# Altium PCB LED_FADER.PcbDoc
Units mm, origin at the board's own origin, x right, y up, seen from the top; angles counter-clockwise.
Board outline 30 x 24 mm, 2 copper layers (F.Cu, B.Cu); 15 components, 8 nets, 35 pads, 17 vias.
Unrouted connection lines stored in the file: 6.
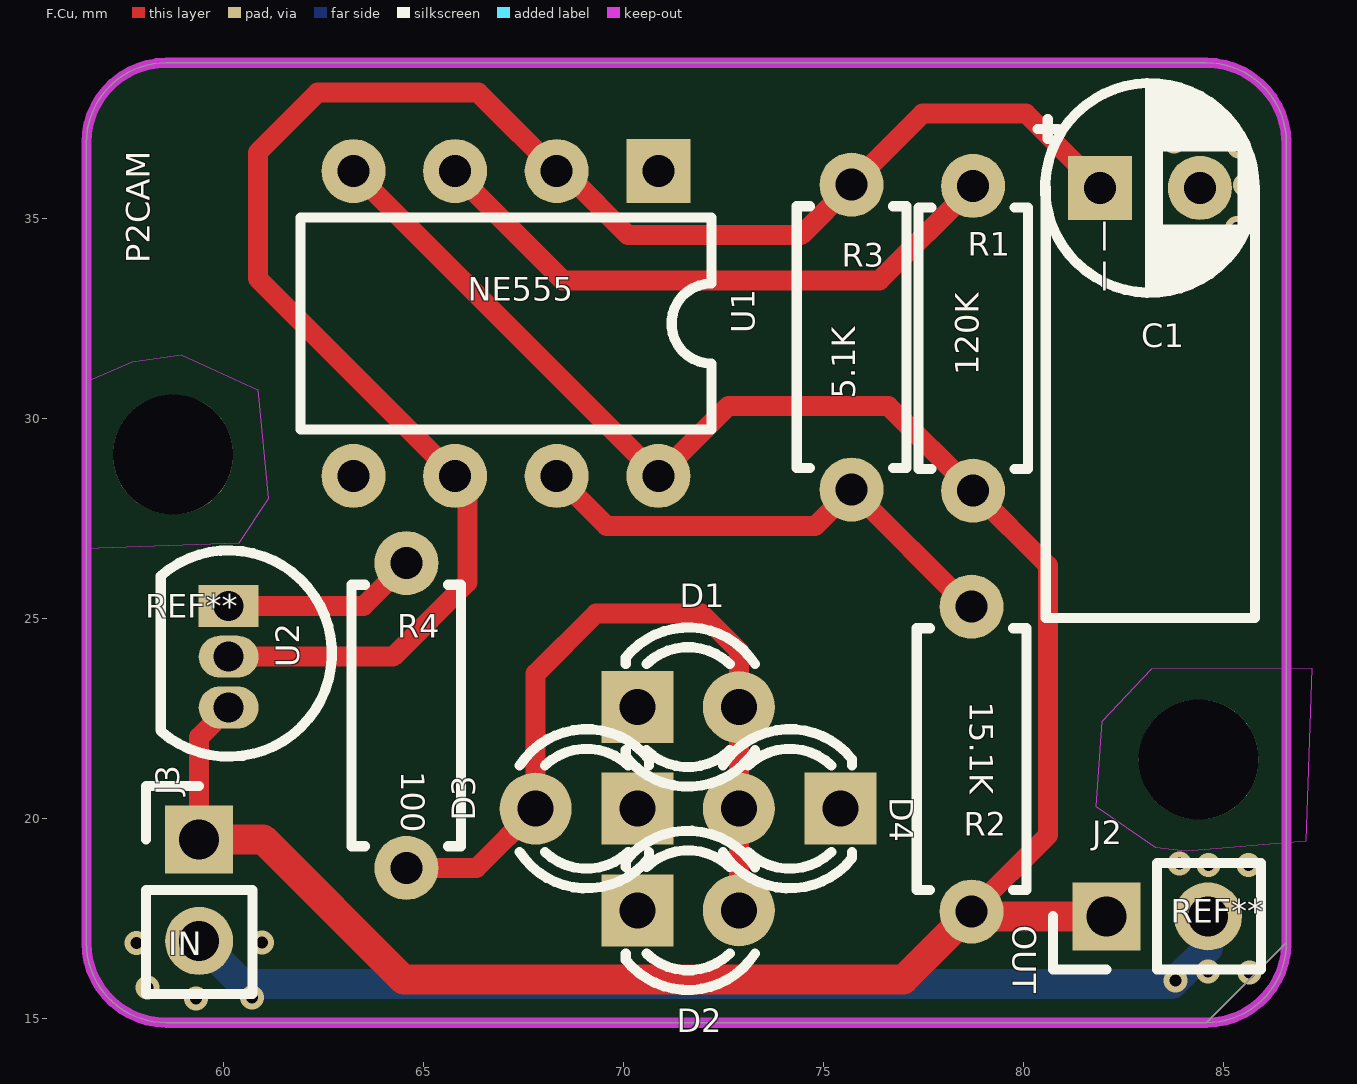
[diagram p0: F.Cu view]
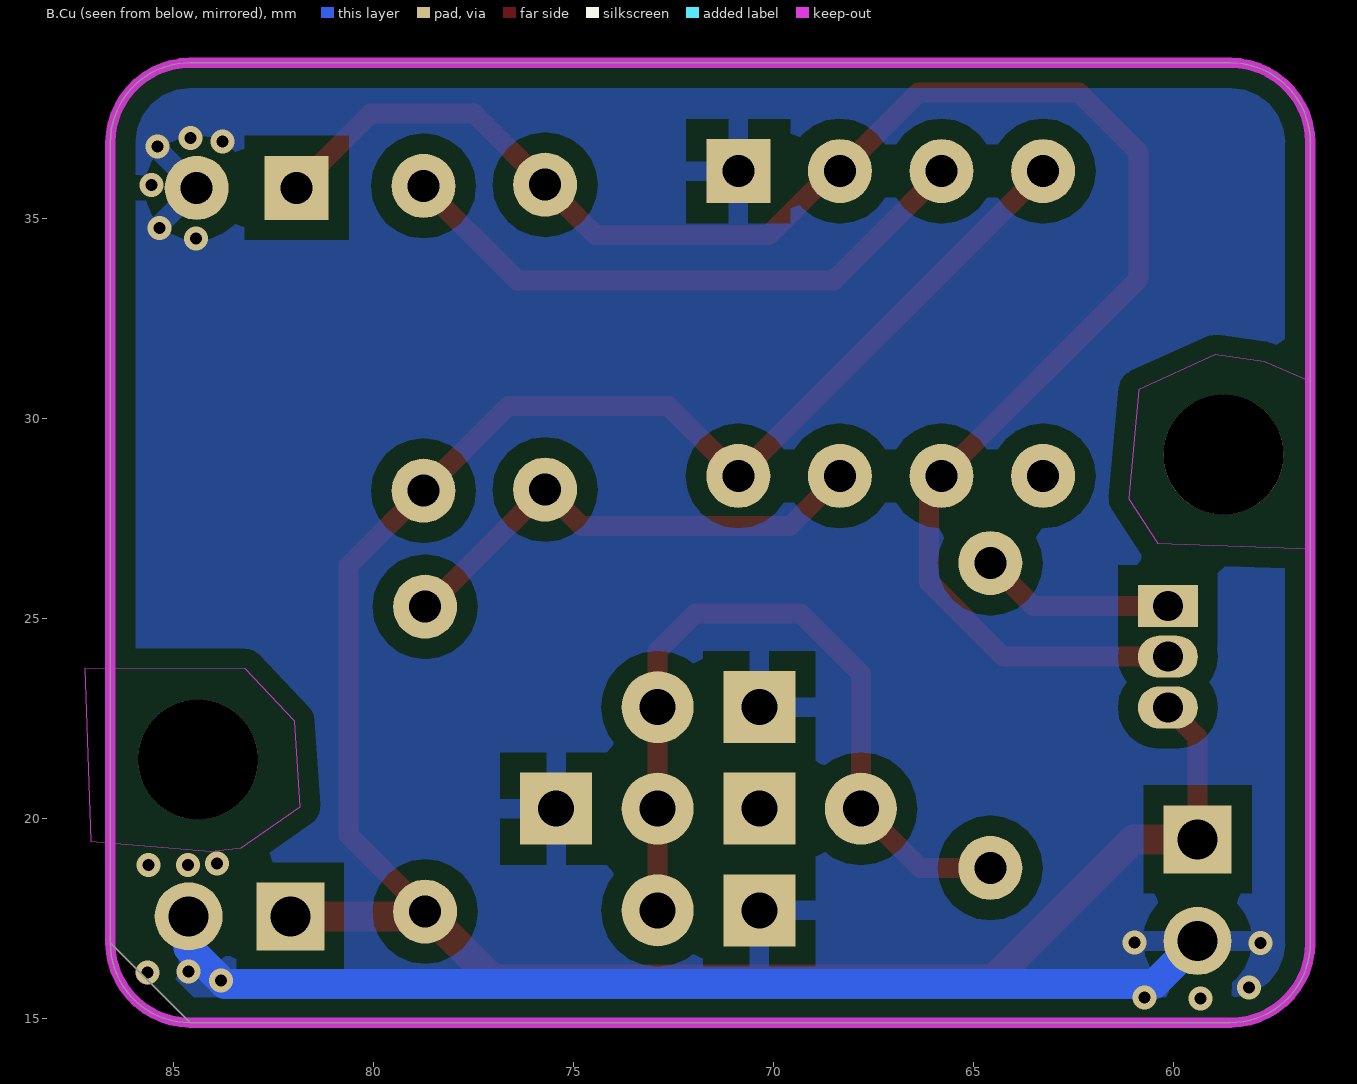
[diagram p1: B.Cu view, seen from below]

## Layer stack, top to bottom
F.Mask: solder mask 0.0102, Solder Resist, Dk 3.5
F.Cu: signal copper 0.0356
Dielectric 1: dielectric 0.32, FR-4, Dk 4.8
B.Cu: signal copper 0.0356
B.Mask: solder mask 0.0102, Solder Resist, Dk 3.5

## Board outline
86.58,16.9 cw(c84.58,16.9) 84.58,14.9 58.58,14.9 cw(c58.58,16.9) 56.58,16.9 56.58,36.9 cw(c58.58,36.9) 84.58,38.9 cw(c84.58,36.9) 86.58,36.9 86.58,16.9 cw(c84.58,16.9) 86.58,16.9

## Design rules (kind name [scope] priority, off if disabled: settings)
Clearance "Clearence 0.5_Polygon" [InNamedPolygon('B.Cu-GND')] p1: gap=0.5 ignorepadtopadclearanceinfootprint=FALSE
MinimumSolderMaskSliver [All] p1: minsoldermaskwidth=0
PolygonConnect Polygon_B.Cu-GND_ConnectDirect [IsNamedPolygon('B.Cu-GND') vs IsVia] p1: connectstyle=Direct reliefconductorwidth=0.254 reliefentries=4 polygonreliefangle="90 Angle" airgapwidth=0.254
PolygonConnect Polygon_B.Cu-GND_ConnectRelief45 [IsNamedPolygon('B.Cu-GND') vs (IsThruPin or IsSMTPin) and (PadShape_AllLayers = 'Round')] p2: connectstyle=Relief reliefconductorwidth=0.5 reliefentries=4 polygonreliefangle="45 Angle" airgapwidth=0.5
PolygonConnect Polygon_B.Cu-GND_ConnectRelief90 [IsNamedPolygon('B.Cu-GND') vs (IsThruPin or IsSMTPin) and (PadShape_AllLayers <> 'Round')] p3: connectstyle=Relief reliefconductorwidth=0.5 reliefentries=4 polygonreliefangle="90 Angle" airgapwidth=0.5
RoutingVias [All] p1: holewidth=0.711 width=1.27 viastyle="Through Hole" minholewidth=0.711 minwidth=1.27 maxholewidth=0.711 maxwidth=1.27
SilkToSilkClearance [All] p1: silktosilkclearance=0
SilkToSolderMaskClearance [IsPad] p1: minsilkscreentomaskgap=0 clearancetoexposedcopper=TRUE
SolderMaskExpansion [All] p1: expansion=0.102 istentingtop=FALSE
Width [All] p1: maxlimit=10 minlimit=0.254 preferedwidth=0.254 minimp=50.000000 maximp=50.000000 favimp=50.000000
27 further rules are at their usual default settings.

## Components (designator, comment, footprint, x,y, rotation, side; value= is the part's Value field where it differs from the comment)
C1 "Comment" CP_Radial_D5.0mm_P2.50mm 81.92,35.77 r0 top value=100u
D1 "Comment" LED_D3.0mm 70.355,22.79 r0 top value=LED_Filled
D2 "Comment" LED_D3.0mm 70.355,17.71 r0 top value=LED_Filled
D3 "Comment" LED_D3.0mm 70.355,20.25 r180 top value=LED_Filled
D4 "Comment" LED_D3.0mm 75.435,20.25 r180 top value=LED_Filled
J2 "Comment" PinHeader_1x02_P2.54mm_Vertical 82.08,17.56 r90 top value=Conn_01x02_MountingPin
J3 "Comment" PinHeader_1x02_P2.54mm_Vertical 59.4,19.485 r0 top value=Conn_01x02_MountingPin
R1 "Comment" R_Axial_DIN0207_L6.3mm_D2.5mm_P7.62mm_Horizontal 78.75,28.2 r90 top value=120K
R2 "Comment" R_Axial_DIN0207_L6.3mm_D2.5mm_P7.62mm_Horizontal 78.71,17.68 r90 top value=15.1K
R3 "Comment" R_Axial_DIN0207_L6.3mm_D2.5mm_P7.62mm_Horizontal 75.71,28.23 r90 top value=5.1K
R4 "Comment" R_Axial_DIN0207_L6.3mm_D2.5mm_P7.62mm_Horizontal 64.58,26.39 r270 top value=100
REF** "Comment" MountingHole_3mm 58.75,29.1 r180 top value=MountingHole_3mm
REF** "Comment" MountingHole_3mm 84.39,21.48 r180 top value=MountingHole_3mm
U1 "Comment" DIP-8_W7.62mm 70.88,36.19 r270 top value=NE555P
U2 "Comment" TO-92L_Inline 60.14,25.32 r270 top value=L78L06_TO92

## Footprints (in the part's own frame and the unit in brackets; to place one, negate y for a bottom-side part, rotate by r counter-clockwise, add the part's x,y. Pads: shape width x height; smd on the part's side, far side on the other; paste and mask are expansions set on the pad)
CP_Radial_D5.0mm_P2.50mm [mm]
  rect 1.6x1.6 hole 0.8 paste-2539.97 mask+0: 1(0,0)
  round 1.6 hole 0.8 paste-2539.97 mask+0: 2(2.5,0)
  silkscreen extent -1.55,-2.62 3.87,2.62
DIP-8_W7.62mm [mm]
  rect 1.6x1.6 hole 0.8 paste-2539.97 mask+0: 1(0,0)
  rrect100% 1.6x1.6 hole 0.8 paste-2539.97 mask+0: 2(0,-2.54) 3(0,-5.08) 4(0,-7.62) 5(7.62,-7.62) 6(7.62,-5.08) 7(7.62,-2.54) 8(7.62,0)
  silkscreen extent 1.16,-8.95 6.46,1.33
LED_D3.0mm [mm]
  rect 1.8x1.8 hole 0.9 paste-2539.97 mask+0: 1(0,0)
  round 1.8 hole 0.9 paste-2539.97 mask+0: 2(2.54,0)
  silkscreen extent -0.29,-1.99 2.94,1.99
MountingHole_3mm [mm]
  round 3 hole 3 paste-2539.97 mask+0: Un1(0,0)
PinHeader_1x02_P2.54mm_Vertical [mm]
  rect 1.7x1.7 hole 1 paste-2539.97 mask+0: 1(0,0)
  rrect100% 1.7x1.7 hole 1 paste-2539.97 mask+0: 2(0,-2.54)
  silkscreen extent -1.33,-3.87 1.33,1.33
R_Axial_DIN0207_L6.3mm_D2.5mm_P7.62mm_Horizontal [mm]
  round 1.6 hole 0.8 paste-2539.97 mask+0: 1(0,0)
  rrect100% 1.6x1.6 hole 0.8 paste-2539.97 mask+0: 2(7.62,0)
  silkscreen extent 0.54,-1.37 7.08,1.37
TO-92L_Inline [mm]
  rect 1.05x1.5 hole 0.75 paste-2539.97 mask+0: 1(0,0)
  rrect100% 1.05x1.5 hole 0.75 paste-2539.97 mask+0: 2(1.27,0) 3(2.54,0)
  silkscreen extent -1.39,-1.7 3.77,2.58

## Part data
C1: library part CP_Radial_D5.0mm_P2.50mm, "CP, Radial series, Radial, pin pitch=2.50mm, , diameter=5mm, Electrolytic Capacitor", Footprint=Capacitor_THT:CP_Radial_D5.0mm_P2.50mm, Description="Unpolarized capacitor"
D1 D2 D3 D4: library part LED_D3.0mm, "LED, diameter 3.0mm, 2 pins", Footprint=LED_THT:LED_D3.0mm, Description="Light emitting diode, filled shape"
J2 J3: library part PinHeader_1x02_P2.54mm_Vertical, "Through hole straight pin header, 1x02, 2.54mm pitch, single row", Footprint=Connector_PinHeader_2.54mm:PinHeader_1x02_P2.54mm_Vertical, Description="Generic connectable mounting pin connector, single row, 01x02, script generated (kicad-library-utils/schlib/autogen/connector/)"
R1 R2 R3 R4: library part R_Axial_DIN0207_L6.3mm_D2.5mm_P7.62mm_Horizontal, "Resistor, Axial_DIN0207 series, Axial, Horizontal, pin pitch=7.62mm, 0.25W = 1/4W, length*diameter=6.3*2.5mm^2, http://cdn-reichelt.de/documents/datenblatt/B400/1_4W%23YAG.pdf", Footprint=Resistor_THT:R_Axial_DIN0207_L6.3mm_D2.5mm_P7.62mm_Horizontal, Description=Resistor
REF** REF**: library part MountingHole_3mm, "Mounting Hole 3mm, no annular", Footprint=MountingHole:MountingHole_3mm
U1: library part DIP-8_W7.62mm, "8-lead though-hole mounted DIP package, row spacing 7.62 mm (300 mils)", Footprint=Package_DIP:DIP-8_W7.62mm, Datasheet=http://www.ti.com/lit/ds/symlink/ne555.pdf, Description="Precision Timers, 555 compatible,  PDIP-8"
U2: library part TO-92L_Inline, "TO-92L leads in-line (large body variant of TO-92), also known as TO-226, wide, drill 0.75mm (see https://www.diodes.com/assets/Package-Files/TO92L.pdf and http://www.ti.com/lit/an/snoa059/snoa059.pdf)", Footprint=Package_TO_SOT_THT:TO-92L_Inline, Datasheet=http://www.st.com/content/ccc/resource/technical/document/datasheet/15/55/e5/aa/23/5b/43/fd/CD00000446.pdf/files/CD00000446.pdf/jcr:content/translations/en.CD00000446.pdf, Description="Positive 100mA 30V Linear Regulator, Fixed Output 6V, TO-92"

## Via types
v1: diameter 0.6, hole 0.3, F.Cu to B.Cu, tented both sides, 17 vias

## Nets (pads, with @x,y where several pads share a name; then routed paths per layer and width w, separated by ;. In a path a pad name is that pad's centre, name@x,y a point inside that pad or via, vN(x,y) a via of type N, cw(c..) or ccw(c..) an arc to the next point about the centre after c; other vN are vias at no path point)
GND: C1.2 D1.1 D2.1 D3.1 D4.1 J2.2 J3.2 U1.1 | length 26.8
  B.Cu w0.75: J3.2 60.475,15.87 83.725,15.87 84.62,16.765 J2.2 J2.2@84.625,17.555
  other v1: 59.32,15.51 60.72,15.53 58.11,15.78 83.815,15.96 85.655,16.16 84.625,16.18 57.83,16.89 60.97,16.9 84.64,18.84 85.63,18.84 83.91,18.88 84.44,34.5 85.35,34.77 85.55,35.84 85.4,36.8 83.77,36.93 84.57,37.02
Net-(D1-A): D1.2 D2.2 D3.2 D4.2 R4.2 | length 19.8
  F.Cu w0.5: R4.2 66.335,18.77 D3.2 67.815,23.625 69.32,25.13 71.96,25.13 72.895,24.195 D1.2 D4.2 D2.2
Net-(U1-DIS): R2.2 R3.1 U1.7 | length 12.6
  F.Cu w0.5: U1.7 69.59,27.32 74.8,27.32 R3.1 78.64,25.3 R2.2 R2.2@78.63,25.3
Net-(U1-Q): R1.2 U1.3 | length 15.1
  F.Cu w0.5: U1.3 65.8,36.15 68.49,33.46 76.41,33.46 78.75,35.8 R1.2
Net-(U1-THR): C1.1 R3.2 U1.2 U1.6 U2.2 | length 44.8
  F.Cu w0.5: U2.2 64.25,24.05 66.11,25.91 66.11,28.26 U1.6 60.87,33.5 60.87,36.66 62.36,38.15 66.38,38.15 68.47,36.06 68.65,36.06 70.12,34.59 74.45,34.59 R3.2 77.49,37.63 80.07,37.63 81.92,35.78 C1.1
Net-(U2-VO): R4.1 U2.1 | length 4.9
  F.Cu w0.5: U2.1 63.51,25.32 R4.1
unconnected-(U1-CV-Pad5): U1.5
VCC: J2.1 J3.1 R1.1 R2.1 U1.4 U1.8 U2.3 | length 61.8
  F.Cu w0.5: J3.1 59.4,22.04 U2.3 ; U1.4 U1.8 72.63,30.32 76.63,30.32 R1.1 80.62,26.33 80.62,19.59 R2.1 ; J2.1@81.755,17.67 J2.1@82.065,17.36
  F.Cu w0.75: J3.1 61,19.485 64.505,15.98 77.01,15.98 R2.1 R2.1@78.71,17.665 ; R2.1@78.405,17.36 78.605,17.56 J2.1 82.08,17.375 J2.1@82.065,17.36
pads on no net: REF**.Un1

## Polygon pours and split planes (outlines as drawn)
GND on B.Cu "B.Cu-GND" (solid, remove dead copper, pour order 2): 56.45,14.95 86.48,14.95 86.64,15.11 86.64,38.7 85.992,39.348 56.45,39.136

## Keep-outs
F.Cu:
  region: 87.071,19.441 84.074,19.186 83.309,19.271 81.832,20.3 81.972,22.435 83.211,23.745 87.22,23.759
  region: 60.87,30.73 61.124,28.001 60.389,26.888 56.54,26.747 56.54,30.91 57.732,31.42 58.953,31.594
B.Cu:
  region: 87.071,19.441 84.074,19.186 83.309,19.271 81.832,20.3 81.972,22.435 83.211,23.745 87.22,23.759
  region: 60.87,30.73 61.124,28.001 60.389,26.888 56.54,26.747 56.54,30.91 57.732,31.42 58.953,31.594
Edge.Cuts:
  lines w0: 84.58,14.9 ccw(c84.58,16.9) 86.58,16.9 ; 84.58,14.9 ccw(c84.58,16.9) 86.58,16.9 ; 84.58,14.9 86.58,16.9 ; 84.58,14.9 58.58,14.9 cw(c58.58,16.9) 56.58,16.9 56.58,36.9 cw(c58.58,36.9) 58.58,38.9 84.58,38.9 cw(c84.58,36.9) 86.58,36.9 86.58,16.9
  lines w0.254: 84.58,14.9 ccw(c84.58,16.9) 86.58,16.9 ; 84.58,14.9 ccw(c84.58,16.9) 86.58,16.9 ; 84.58,14.9 58.58,14.9 cw(c58.58,16.9) 56.58,16.9 56.58,36.9 cw(c58.58,36.9) 58.58,38.9 84.58,38.9 cw(c84.58,36.9) 86.58,36.9 86.58,16.9

## Silkscreen, mask and mechanical layers (free items; w line width, h text height)
F.SilkS:
  lines w0.254: 80.565,35.78 80.565,25.02 85.795,25.02 85.795,35.78
  text "P2CAM" at 58.365,33.886 h1 r90
  text "| / |" at 81.908,33.206 h1
  text "NE555" at 66.118,32.748 h1
  text "120K" at 79.085,31.085 h1 r90
  text "5.1K" at 76.002,30.497 h1 r90
  text "15.1K" at 78.468,22.929 h1 r270
  text "100" at 64.255,21.181 h1 r270
  text "OUT" at 79.545,17.336 h1 r270
  text "IN" at 58.622,16.383 h1
User.3:
  circle w0.254: c71.55,20.29 r4.524
  lines w0.254: 70.34,19.38 70.76,19.38 ; 71.42,14.88 72.46,14.88 ; 86.56,21.384 86.56,22.944